# EAGLE board FR4 6.0 (EAGLE 7.2.0), part 1 of 2
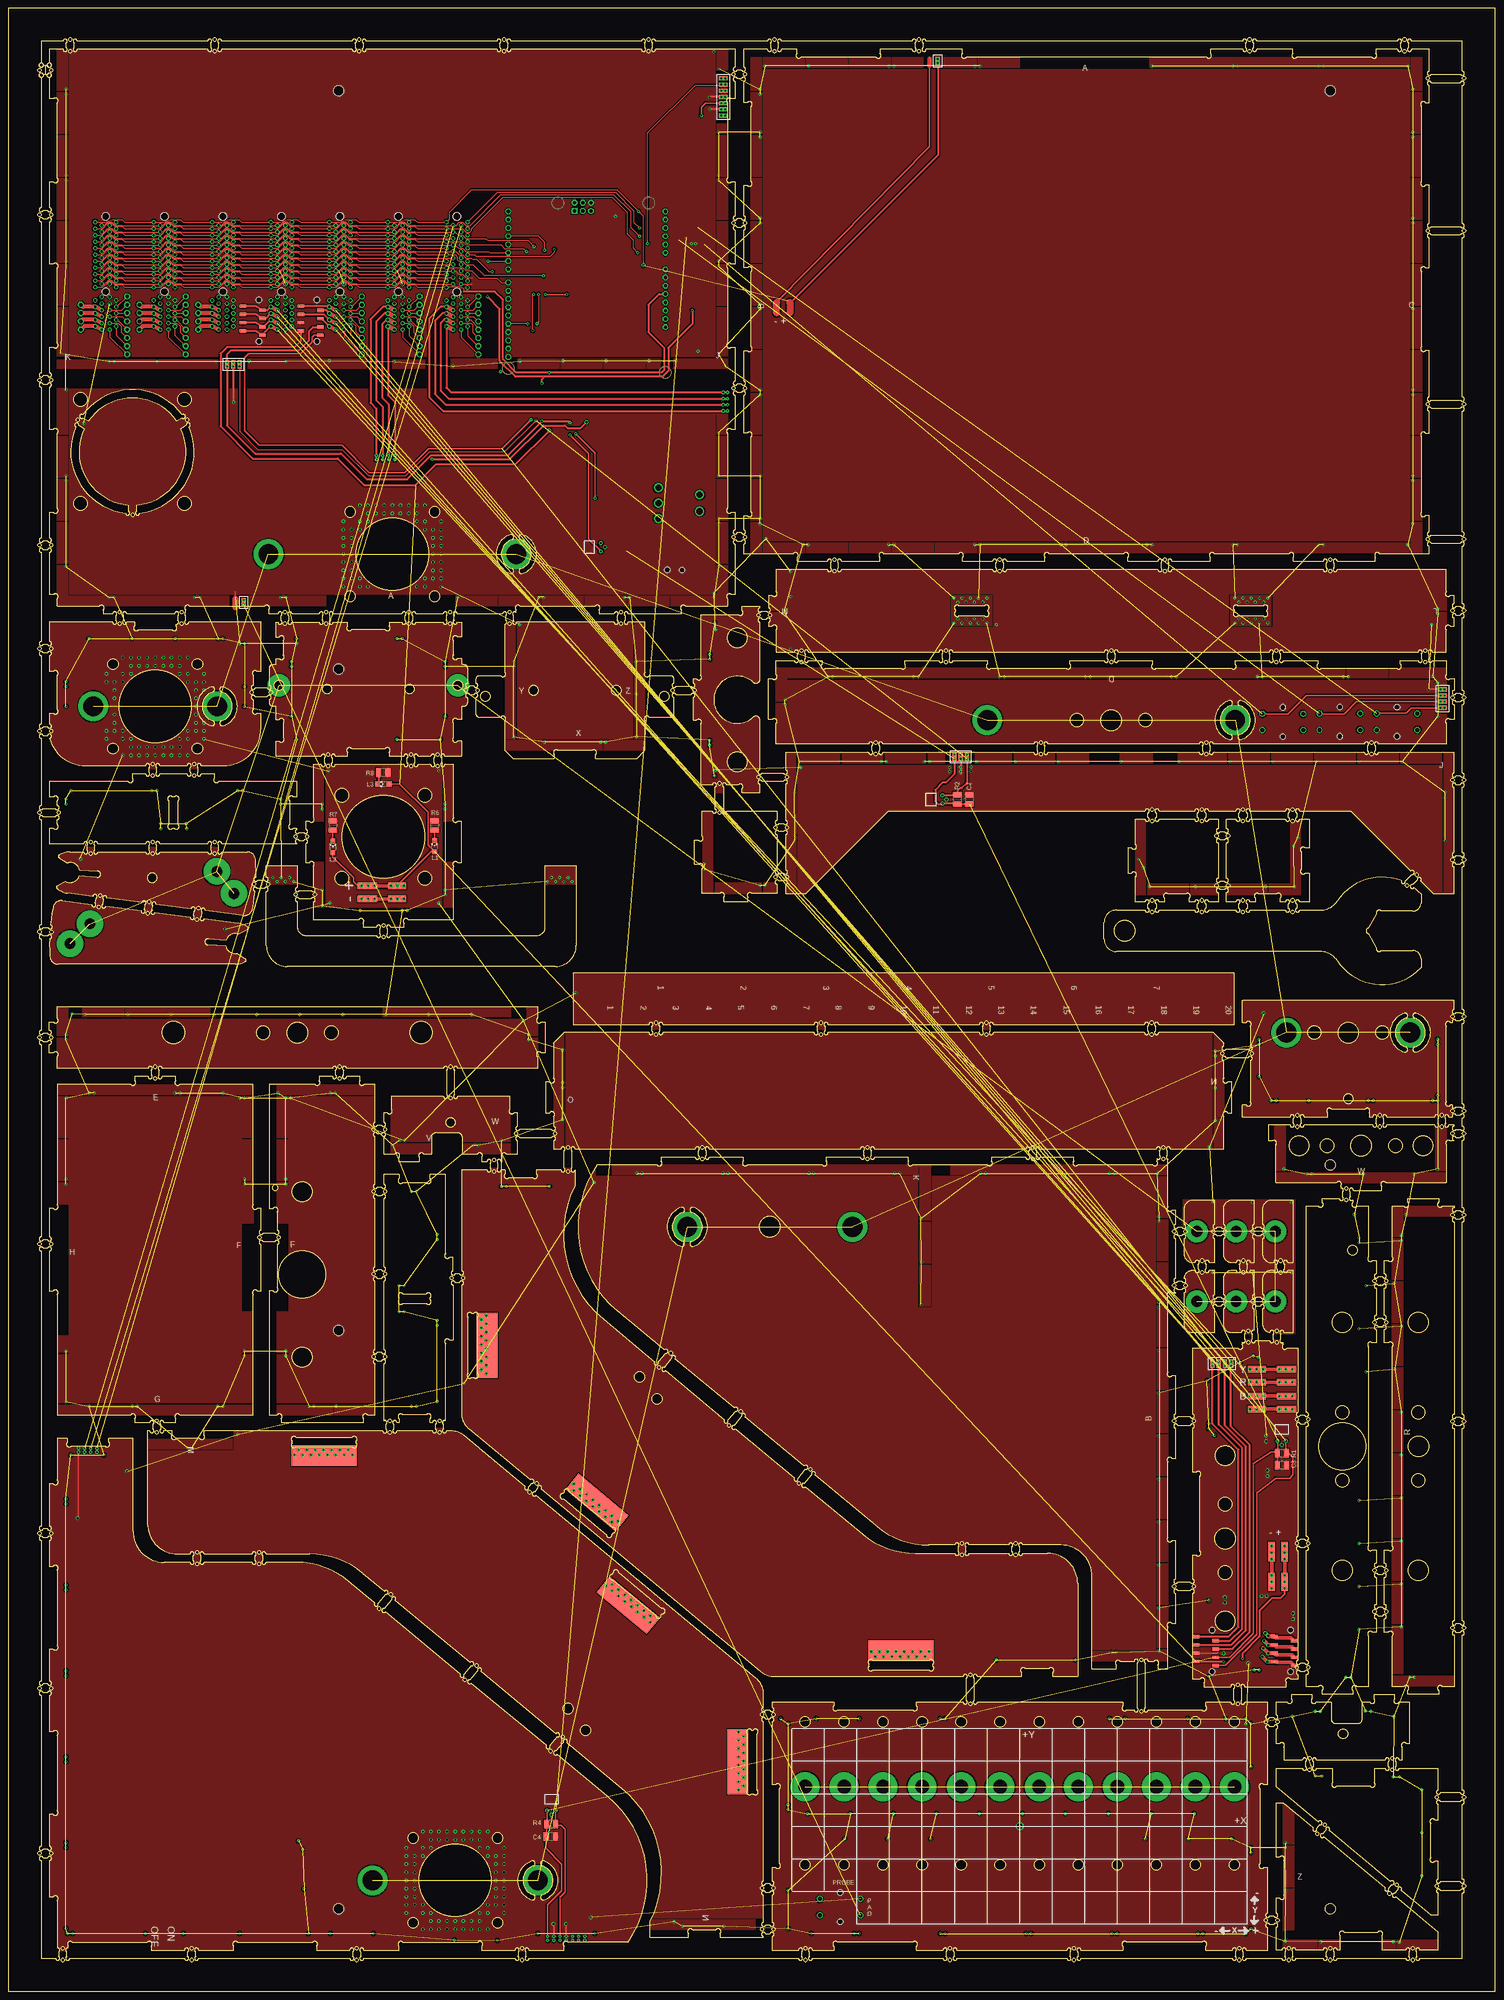
[diagram p0: board, top side]
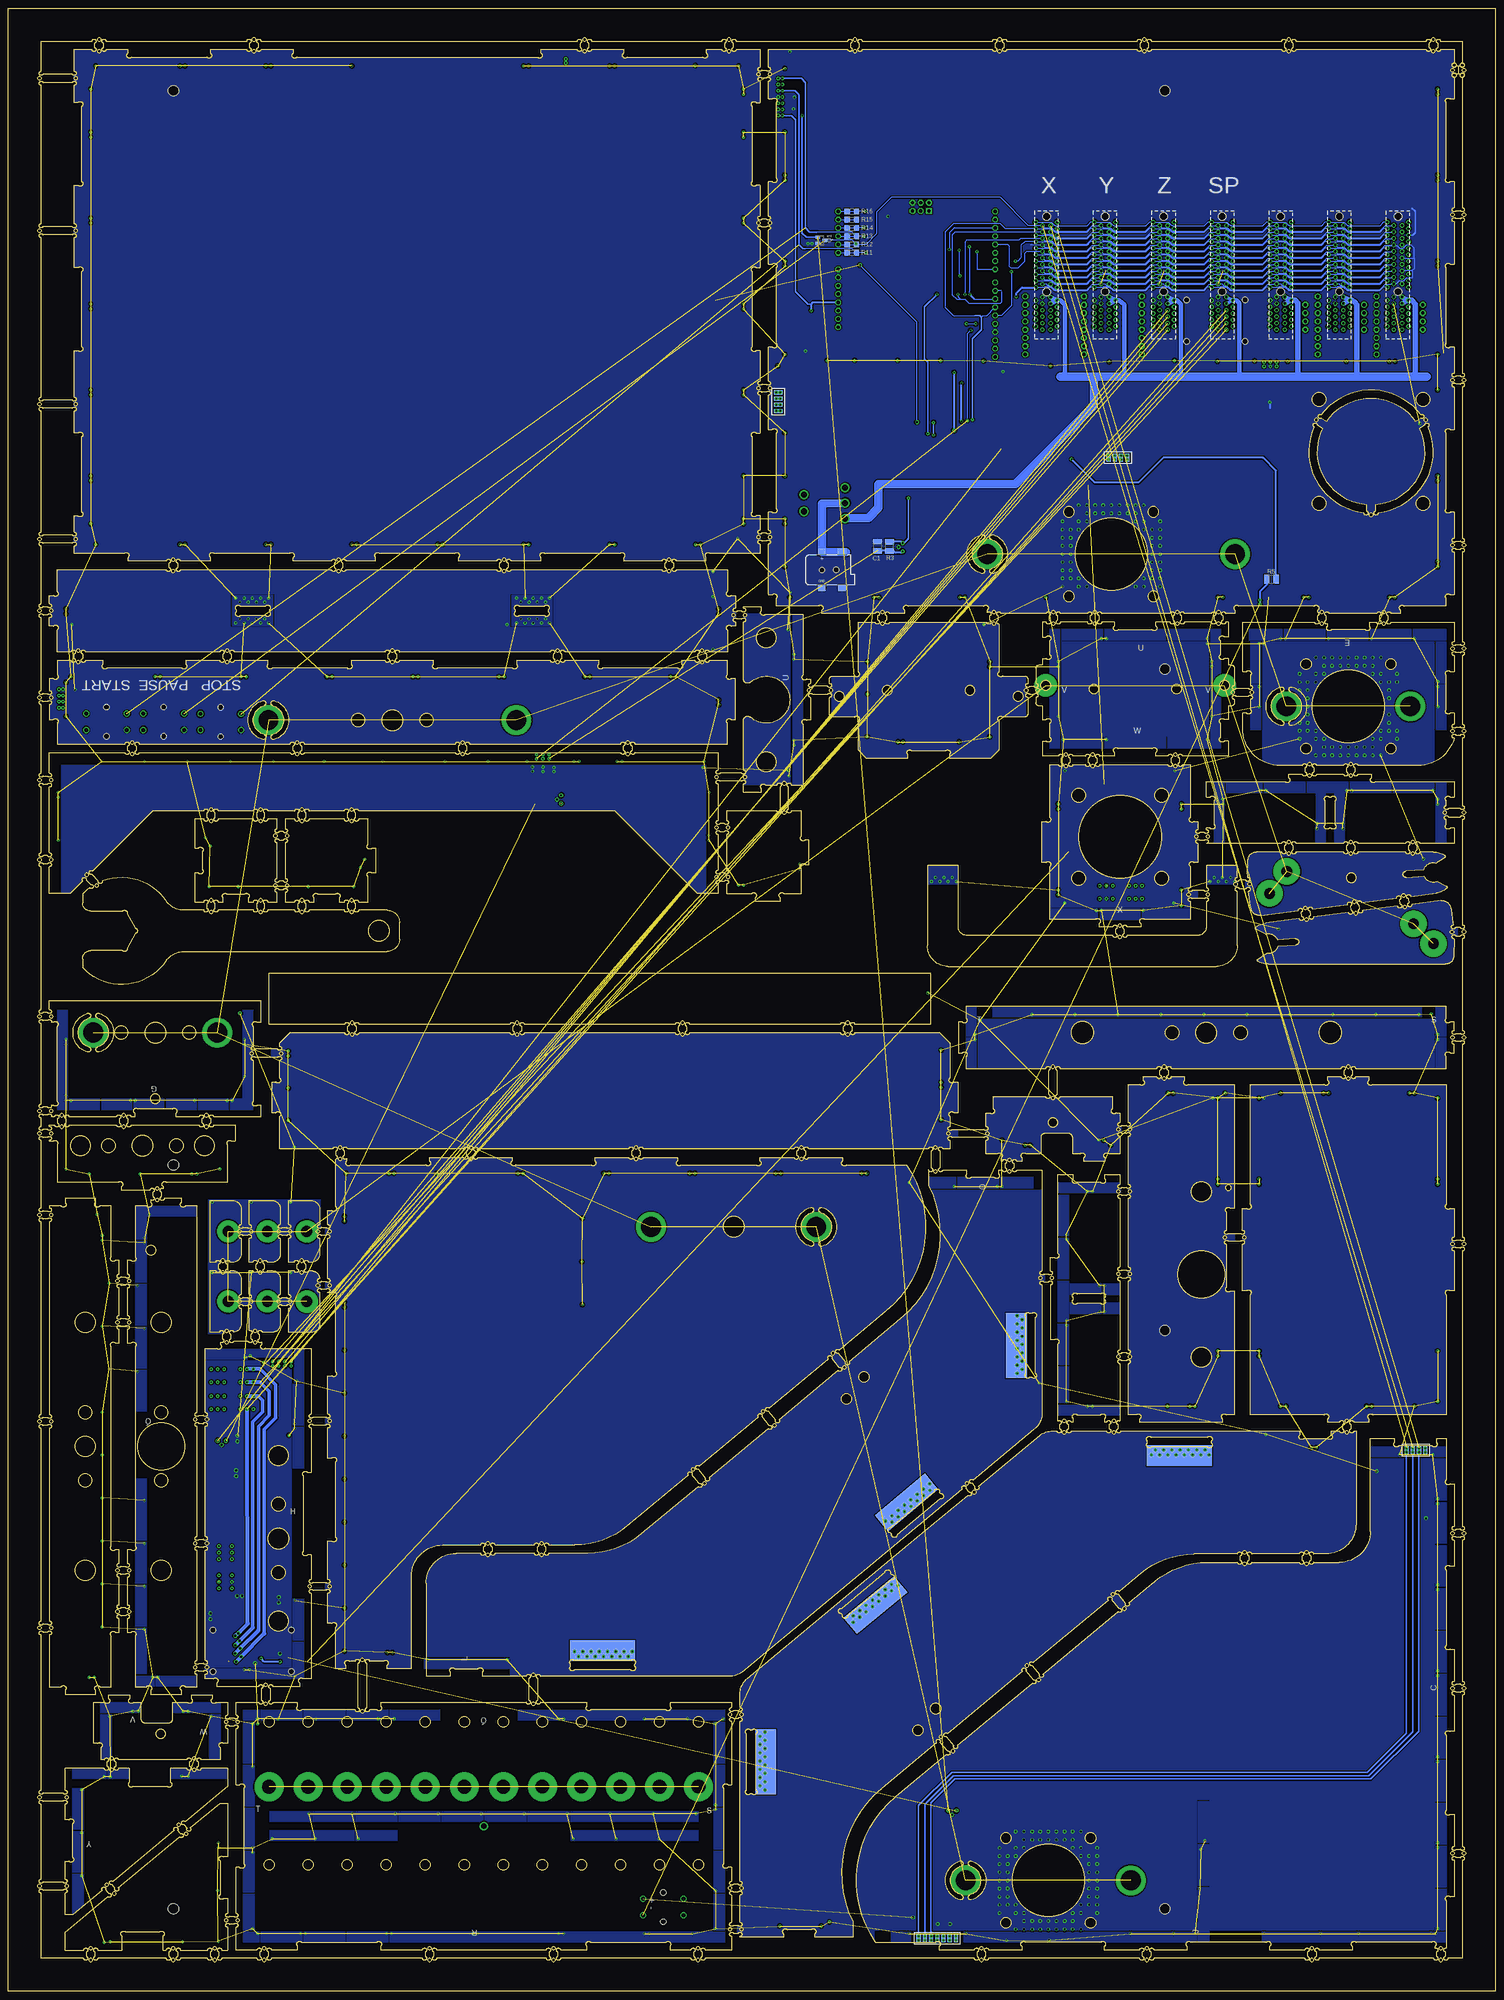
[diagram p1: board, bottom side, seen from below]

Size 457.2 x 609.6 mm. Coordinates in mm from the lower left corner, seen from the top.
Outline: 2926 segments
Outline: circle at 9.65,590.55 radius 0.51
Outline: circle at 10.16,592.07 radius 0.64
Outline: circle at 10.16,589.03 radius 0.64
Outline: circle at 12.7,589.03 radius 0.64
Outline: circle at 12.7,592.07 radius 0.64
Outline: circle at 13.21,590.55 radius 0.51
Outline: circle at 374.1,139.22 radius 3.17
Outline: circle at 234.17,234.98 radius 3.17
Outline: circle at 411.98,294.7 radius 3.17
Outline: circle at 415.93,259.92 radius 3.17
Outline: circle at 433.5,157.02 radius 2.03
Outline: circle at 433.5,178.02 radius 2.03
Outline: circle at 433.5,167.52 radius 3.17
Outline: circle at 127,294.69 radius 3.43
Outline: circle at 99.4,294.69 radius 2.1
Outline: circle at 88.9,294.69 radius 3.17
Outline: circle at 78.4,294.69 radius 2.1
Outline: circle at 50.8,294.69 radius 3.43
Outline: circle at 144.27,399.9 radius 0.51
Outline: circle at 140.72,399.9 radius 0.51
Copper layers (1*16): Top 0.035mm / dielectric 1.5mm / Bottom 0.035mm
Design rules "SparkFun *": minimum track width 8mil, minimum drill 20mil, track to track 15mil, track to pad 0.38mm, pad to pad 8mil, via to via 8mil, smd to smd 8mil, copper to edge 5mil, drill to drill 8mil, minimum pad ring 12mil, minimum via ring 10mil, stop-mask expansion 4mil, vias tented up to drill 400mil, thermal gap 10mil
Holes 3.17 mm at 101.6,25.4 406.4,25.4 406.4,254 101.6,584.2 101.6,406.4 101.6,203.2 406.4,584.2

## Footprints (pad centres in the part's own frame; a part is rotated, then mirrored left to right if it is on the bottom)
C1210 = smd 1.6 x 2.7: 1 -1.4,0; 2 1.4,0
DCJACK_2MM_SMT = smd 2.4 x 2: GND 0,-5.5; GNDBREAK 6.2,-5.5; PWR1 0,5.5; PWR2 6.2,5.5 | hole 1.6: 0,0 | hole 1.8: 4.5,0
1X04-CLEANBIG = drill 1.016 pad 1.778: 1 -3.81,0; 2 -1.27,0; 3 1.27,0; 4 3.81,0
1X08-CLEANBIG = drill 1.016 pad 1.778 octagon: 1 -8.89,0; 2 -6.35,0; 3 -3.81,0; 4 -1.27,0; 5 1.27,0; 6 3.81,0; 7 6.35,0; 8 8.89,0
CHIPLED_1206 = smd 1.5 x 1.5: A 0,-1.75; C 0,1.75
ARDUINOR3_ICSP = drill 1 pad 1.676 octagon: 3V 35.56,2.54; 5V 38.1,2.54; A0 50.8,2.54; A1 53.34,2.54; A2 55.88,2.54; A3 58.42,2.54; A4 60.96,2.54; A5 63.5,2.54; AREF 23.876,50.8; D0 63.5,50.8; D1 60.96,50.8; D2 58.42,50.8; D3 55.88,50.8; D4 53.34,50.8; D5 50.8,50.8; D6 48.26,50.8; D7 45.72,50.8; D8 41.656,50.8; D9 39.116,50.8; D10 36.576,50.8; D11 34.036,50.8; D12 31.496,50.8; D13 28.956,50.8; GND 26.416,50.8; GND@1 43.18,2.54; GND@2 40.64,2.54; IOREF 30.48,2.54; RESERVED 27.94,2.54; RESET 33.02,2.54; SCL 18.796,50.8; SDA 21.336,50.8; VIN 45.72,2.54 | drill 1 pad 1.778 octagon: 5V_ICSP 66.167,30.48; GND@3 66.167,25.4; MOSI 66.167,27.94; RESET_ICSP 63.627,25.4; SCK 63.627,27.94 | drill 1 pad 1.778 square: MISO 63.627,30.48
SOT23 = smd 1 x 1.4: 1 -0.95,-1.1; 2 0.95,-1.1; 3 0,1.1
R1210 = smd 1.6 x 2.7: 1 -1.4,0; 2 1.4,0
R1206 = smd 1.6 x 1.803: 1 -1.422,0; 2 1.422,0
STEPPER_PAD = smd 1.27 x 2.54: P$1 0,0; P$2 1.905,0; P$3 3.81,0; P$4 5.715,0 | drill 0.381: P$1@1 0,0.635; P$1@2 0,-0.635; P$2@1 1.905,0.635; P$2@2 1.905,-0.635; P$3@1 3.81,0.635; P$3@2 3.81,-0.635; P$4@1 5.715,0.635; P$4@2 5.715,-0.635
10018784-10211TLF-TRACE = drill 0.7 pad 1.016: P$1 1.25,-1; P$2 3.25,-2; P$3 1.25,-3; P$4 3.25,-4; P$5 1.25,-5; P$6 3.25,-6; P$7 1.25,-7; P$8 3.25,-8; P$9 1.25,-9; P$10 3.25,-10; P$11 1.25,-11; P$12 3.25,-14; P$13 1.25,-15; P$14 3.25,-16; P$15 1.25,-17; P$16 3.25,-18; P$17 1.25,-19; P$18 3.25,-20; P$19 1.25,-21; P$20 3.25,-22; P$21 1.25,-23; P$22 3.25,-24; P$23 1.25,-25; P$24 3.25,-26; P$25 1.25,-27; P$26 3.25,-28; P$27 1.25,-29; P$28 3.25,-30; P$29 1.25,-31; P$30 3.25,-32; P$31 1.25,-33; P$32 3.25,-34; P$33 -1.25,-1; P$34 -3.25,-2; P$35 -1.25,-3; P$36 -3.25,-4; P$37 -1.25,-5; P$38 -3.25,-6; P$39 -1.25,-7; P$40 -3.25,-8; P$41 -1.25,-9; P$42 -3.25,-10; P$43 -1.25,-11; P$44 -3.25,-14; P$45 -1.25,-15; P$46 -3.25,-16; P$47 -1.25,-17; P$48 -3.25,-18; P$49 -1.25,-19; P$50 -3.25,-20; P$51 -1.25,-21; P$52 -3.25,-22; P$53 -1.25,-23; P$54 -3.25,-24; P$55 -1.25,-25; P$56 -3.25,-26; P$57 -1.25,-27; P$58 -3.25,-28; P$59 -1.25,-29; P$60 -3.25,-30; P$61 -1.25,-31; P$62 -3.25,-32; P$63 -1.25,-33; P$64 -3.25,-34 | hole 2.35: 0,-12.65; 0,-35.8
1001874-10211TLF- = drill 0.7 pad 1.016: P$1 1.25,-0.99; P$2 3.25,-1.99; P$3 1.25,-2.99; P$4 3.25,-3.99; P$5 1.25,-4.99; P$6 3.25,-5.99; P$7 1.25,-6.99; P$8 3.25,-7.99; P$9 1.25,-8.99; P$10 3.25,-9.99; P$11 1.25,-10.99; P$12 3.25,-13.99; P$13 1.25,-14.99; P$14 3.25,-15.99; P$15 1.25,-16.99; P$16 3.25,-17.99; P$17 1.25,-18.99; P$18 3.25,-19.99; P$19 1.25,-20.99; P$20 3.25,-21.99; P$21 1.25,-22.99; P$22 3.25,-23.99; P$23 1.25,-24.99; P$24 3.25,-25.99; P$25 1.25,-26.99; P$26 3.25,-27.99; P$27 1.25,-28.99; P$28 3.25,-29.99; P$29 1.25,-30.99; P$30 3.25,-31.99; P$31 1.25,-32.99; P$32 3.25,-33.99; P$33 -1.25,-0.99; P$34 -3.25,-1.99; P$35 -1.25,-2.99; P$36 -3.25,-3.99; P$37 -1.25,-4.99; P$38 -3.25,-5.99; P$39 -1.25,-6.99; P$40 -3.25,-7.99; P$41 -1.25,-8.99; P$42 -3.25,-9.99; P$43 -1.25,-10.99; P$44 -3.25,-13.99; P$45 -1.25,-14.99; P$46 -3.25,-15.99; P$47 -1.25,-16.99; P$48 -3.25,-17.99; P$49 -1.25,-18.99; P$50 -3.25,-19.99; P$51 -1.25,-20.99; P$52 -3.25,-21.99; P$53 -1.25,-22.99; P$54 -3.25,-23.99; P$55 -1.25,-24.99; P$56 -3.25,-25.99; P$57 -1.25,-26.99; P$58 -3.25,-27.99; P$59 -1.25,-28.99; P$60 -3.25,-29.99; P$61 -1.25,-30.99; P$62 -3.25,-31.99; P$63 -1.25,-32.99; P$64 -3.25,-33.99 | hole 2.35: 0,-12.64; 0,-35.79
90814-0808 = smd 1 x 2: P$1 0,0; P$2 1.27,5.999; P$3 2.54,0; P$4 3.81,5.999; P$5 5.08,0; P$6 6.35,5.999; P$7 7.62,0; P$8 8.89,5.999 | hole 1.75: -1.93,1.1; 10.81,1.1
104188-0210 = drill 0.381: P$1 -2,2; P$2 0,2; P$3 2,2; P$4 7,2; P$5 9,2; P$6 11,2; P$7 11,-2; P$8 9,-2; P$9 7,-2; P$10 2,-2; P$11 0,-2; P$12 -2,-2 | smd 5.5 x 2: PIN_1@1 0,2; PIN_2@1 0,-2 | smd 6 x 2: PIN_1@2 9.25,2; PIN_2@2 9.25,-2
3_WIRE_PAD = smd 1.27 x 2.54: P$1 0,0; P$2 1.905,0; P$3 3.81,0 | drill 0.381: P$1@1 0,0.635; P$1@2 0,-0.635; P$2@1 1.905,0.635; P$2@2 1.905,-0.635; P$3@1 3.81,0.635; P$3@2 3.81,-0.635
DRV5033_TO_92 = drill 0.559: P$1 -1.27,-3.5; P$2 0,-4.77; P$3 1.27,-3.5
WELDPAD_.79X.353 = smd 20.066 x 6.35: P$1 0,-4.064 | drill 0.381: P$2 -9.144,-3.81; P$4 -6.604,-3.81; P$6 -4.064,-3.81; P$8 -1.524,-3.81; P$10 1.016,-3.81; P$12 3.556,-3.81; P$14 6.096,-3.81; P$16 8.636,-3.81; P$18 -7.874,-2.286; P$20 -5.334,-2.286; P$22 -2.794,-2.286; P$24 -0.254,-2.286; P$26 2.286,-2.286; P$28 4.826,-2.286; P$30 7.366,-2.286 | smd 20.066 x 6.35 bottom: P$34 0,-4.064
STEPPER_PAD-7 = smd 1.27 x 2.54: P$1 0,0; P$2 1.905,0; P$3 3.81,0; P$4 5.715,0; P$5 7.62,0; P$6 9.525,0; P$7 11.43,0 | drill 0.381: P$1@1 0,0.635; P$1@2 0,-0.635; P$2@1 1.905,0.635; P$2@2 1.905,-0.635; P$3@1 3.81,0.635; P$3@2 3.81,-0.635; P$4@1 5.715,0.635; P$4@2 5.715,-0.635; P$5@1 7.62,0.635; P$5@2 7.62,-0.635; P$6@1 9.525,0.635; P$6@2 9.525,-0.635; P$7@1 11.43,0.635; P$7@2 11.43,-0.635
12MM_BUTTON = drill 1.2: P$1 -6.25,2.5; P$2 6.25,2.5; P$3 -6.25,-2.5; P$4 6.25,-2.5 | hole 1.7: 0,4.5; 0,-4.5
1PIN_PAD = smd 1.27 x 2.54: P$1 0,0 | drill 0.381: P$1@1 0,0.635; P$1@2 0,-0.635
100SP1T2B4M6QE = drill 1.85: P$1 0,0; P$2 0,-5.08; P$3 12.7,-2.54; P$4 12.7,2.16; P$5 12.7,-7.24

## Placement (x,y rotation side)
C1  [C1210]  189.99,444.2 270 bottom
C2  [C1210]  295.43,366.42 270 top
C3  [C1210]  391.54,161.72 180 top
C4  [C1210]  166.85,47.57 180 top
CN1  [DCJACK_2MM_SMT]  207.09,436.91 0 bottom
CN2  1X4-CLEANBIG  [1X04-CLEANBIG]  40.39,514.6 90 top
CN3  1X4-CLEANBIG  [1X04-CLEANBIG]  22.35,514.6 90 top
CN4  1X4-CLEANBIG  [1X04-CLEANBIG]  58.42,514.6 90 top
JP1  [1X08-CLEANBIG]  54.61,512.06 90 top
JP2  [1X08-CLEANBIG]  36.58,512.06 90 top
JP3  [1X08-CLEANBIG]  144.53,512.06 90 top
JP4  [1X08-CLEANBIG]  126.49,512.06 90 top
JP5  [1X08-CLEANBIG]  108.71,512.06 90 top
L1  [CHIPLED_1206]  131.06,352.04 0 top
L2  [CHIPLED_1206]  99.82,351.79 0 top
L3  [CHIPLED_1206]  115.32,371.09 90 top
M1  ARDUINO_R3_ICSP  [ARDUINOR3_ICSP]  204.59,483.62 90 top
Q1  [SOT23]  207.26,538.23 270 bottom
R1  1k  [R1210]  391.54,165.43 0 top
R2  1k  [R1210]  291.82,366.37 90 top
R3  1k  [R1210]  186.31,444.17 90 bottom
R4  1k  [R1210]  166.9,51.46 0 top
R5  1k  [R1210]  68.83,434.09 0 bottom
R6  1k  [R1210]  131.06,358.39 270 top
R7  1k  [R1210]  99.82,358.39 270 top
R8  1k  [R1210]  115.32,374.65 180 top
R11  [R1206]  197.87,534.42 180 bottom
R12  [R1206]  197.87,536.96 180 bottom
R13  [R1206]  197.87,539.5 180 bottom
R14  [R1206]  197.87,542.04 180 bottom
R15  [R1206]  197.87,544.58 180 bottom
R16  [R1206]  197.87,547.12 180 bottom
U$1  STEPPER_PAD  [STEPPER_PAD]  220.47,491.49 270 bottom
U$2  10018784-10211TLF-TRACE  [10018784-10211TLF-TRACE]  30,509.79 180 bottom
U$3  10018784-10211TLF-TRACE  [10018784-10211TLF-TRACE]  48,509.79 180 bottom
U$4  10018784-10211TLF-TRACE  [10018784-10211TLF-TRACE]  66,509.79 180 bottom
U$5  10018784-10211TLF-TRACE  [10018784-10211TLF-TRACE]  84,509.79 180 bottom
U$6  10018784-10211TLF-TRACE  [10018784-10211TLF-TRACE]  102,509.79 180 bottom
U$7  10018784-10211TLF-TRACE  [10018784-10211TLF-TRACE]  120,509.79 180 bottom
U$8  10018784-10211TLF-  [1001874-10211TLF-]  138,509.79 180 bottom
U$9  STEPPER_PAD  [STEPPER_PAD]  118.9,471.42 0 bottom
U$10  90814-0808  [90814-0808]  95.98,509.08 90 top
U$11  90814-0808  [90814-0808]  78.13,509.11 90 top
U$12  104188-0210  [104188-0210]  383.79,189.23 0 top
U$13  3_PIN_PAD  [3_WIRE_PAD]  290.92,379.53 0 top
U$14  90814-0808  [90814-0808]  371.17,100.16 90 top
U$15  90814-0808  [90814-0808]  395.36,100.16 90 top
U$16  3_PIN_PAD  [3_WIRE_PAD]  67.31,500.13 0 top
U$17  104188-0210  [104188-0210]  383.79,180.97 0 top
U$18  DRV5033_TO_92  [DRV5033_TO_92]  178.69,443.92 90 top
U$19  DRV5033_TO_92  [DRV5033_TO_92]  283.69,366.37 90 top
U$20  DRV5033_TO_92  [DRV5033_TO_92]  391.52,172.75 0 top
U$21  DRV5033_TO_92  [DRV5033_TO_92]  166.98,59.05 0 top
U$22  WELDPAD_.79X.353  [WELDPAD_.79X.353]  193.17,121.86 320.5 top
U$23  WELDPAD_.79X.353  [WELDPAD_.79X.353]  178.44,147.19 220 bottom
U$24  WELDPAD_.79X.353  [WELDPAD_.79X.353]  274.45,100.65 180 bottom
U$25  WELDPAD_.79X.353  [WELDPAD_.79X.353]  228.35,70.55 270 top
U$26  WELDPAD_.79X.353  [WELDPAD_.79X.353]  143.19,198.56 270 bottom
U$27  WELDPAD_.79X.353  [WELDPAD_.79X.353]  97.16,168.72 0 top
U$28  104188-0210  [104188-0210]  390.4,125.86 90 top
U$29  104188-0210  [104188-0210]  119.63,337.82 180 top
U$30  STEPPER_PAD-7  [STEPPER_PAD-7]  165.86,16.33 180 bottom
U$31  STEPPER_PAD  [STEPPER_PAD]  21.59,166.37 180 bottom
U$32  STEPPER_PAD-7  [STEPPER_PAD-7]  219.84,576.58 90 top
U$33  STEPPER_PAD  [STEPPER_PAD]  440.94,400.23 270 top
U$34  STEPPER_PAD  [STEPPER_PAD]  375.92,192.91 180 top
U$35  SKHCBFA010_12MM_BUTTON  [12MM_BUTTON]  426.95,390.25 0 bottom
U$36  SKHCBFA010_12MM_BUTTON  [12MM_BUTTON]  409.37,390.25 0 bottom
U$37  SKHCBFA010_12MM_BUTTON  [12MM_BUTTON]  391.85,390.19 0 bottom
U$39  1PIN_PAD  [1PIN_PAD]  72.39,426.97 0 top
U$40  1PIN_PAD  [1PIN_PAD]  285.75,593.34 0 top
U$41  100SP1T2B4M6QE  [100SP1T2B4M6QE]  212.6,454.91 180 top
U$42  SKHCBFA010_12MM_BUTTON  [12MM_BUTTON]  255.78,25.91 0 top

## Library data of the parts
C1-C4 CN1-CN4 JP1-JP5 L1-L3 M1 Q1 R1-R8 R11-R16 = adafruit
U$1-U$37 U$39-U$42 = PocketNC

## Nets
3V: C1.2 C2.2 C3.2 C4.2 M1.3V R1.1 R2.1 R3.1 R4.1 U$8.P$12 U$10.P$3 U$13.P$1@2 U$14.P$3 U$16.P$1@2 U$18.P$1 U$19.P$1 U$20.P$1 U$21.P$1 U$30.P$1@2 U$32.P$1@2
5V: L1.A L2.A L3.A M1.5V U$8.P$44 U$10.P$2 U$14.P$2 U$28.P$11 U$29.P$11
AUX1_A1: CN4.1 U$4.P$33 U$4.P$34
AUX1_A2: CN4.2 U$4.P$35 U$4.P$36
AUX1_A3: CN4.3 U$4.P$37 U$4.P$38
AUX1_A4: CN4.4 U$4.P$39 U$4.P$40
AUX1_B1: U$4.P$1
AUX1_B2: U$4.P$2
AUX1_B3: U$4.P$3
AUX1_B4: U$4.P$4
AUX1_B5: U$4.P$5
AUX1_B6: U$4.P$6
AUX1_B7: U$4.P$7
AUX1_B8: U$4.P$8
AUX2_A1: CN2.1 U$3.P$33 U$3.P$34
AUX2_A2: CN2.2 U$3.P$35 U$3.P$36
AUX2_A3: CN2.3 U$3.P$37 U$3.P$38
AUX2_A4: CN2.4 U$3.P$39 U$3.P$40
AUX2_B1: JP1.1 U$3.P$1
AUX2_B2: JP1.2 U$3.P$2
AUX2_B3: JP1.3 U$3.P$3
AUX2_B4: JP1.4 U$3.P$4
AUX2_B5: JP1.5 U$3.P$5
AUX2_B6: JP1.6 U$3.P$6
AUX2_B7: JP1.7 U$3.P$7
AUX2_B8: JP1.8 U$3.P$8
AUX3_A1: CN3.1 U$2.P$33 U$2.P$34
AUX3_A2: CN3.2 U$2.P$35 U$2.P$36
AUX3_A3: CN3.3 U$2.P$37 U$2.P$38
AUX3_A4: CN3.4 U$2.P$39 U$2.P$40
AUX3_B1: JP2.1 U$2.P$1
AUX3_B2: JP2.2 U$2.P$2
AUX3_B3: JP2.3 U$2.P$3
AUX3_B4: JP2.4 U$2.P$4
AUX3_B5: JP2.5 U$2.P$5
AUX3_B6: JP2.6 U$2.P$6
AUX3_B7: JP2.7 U$2.P$7
AUX3_B8: JP2.8 U$2.P$8
DIR_5: U$8.P$59
DIR_X: M1.D5 U$8.P$57
DIR_Y: M1.D6 U$8.P$26
DIR_Z: M1.D7 U$8.P$58
ENBL: M1.D8 U$8.P$50
ENBL_2: U$8.P$19
ENBL_3: U$8.P$51
ENBL_4: U$8.P$20
ENBL_5: U$8.P$52
ENBL_6: U$8.P$21
GND: C1.1 C2.1 C3.1 C4.1 CN1.GND CN1.GNDBREAK M1.GND M1.GND@1 M1.GND@3 Q1.2 R6.1 R7.1 R8.1 U$2.P$9 U$2.P$10 U$2.P$11 U$2.P$13 U$2.P$25 U$2.P$49 U$2.P$53 U$2.P$60 U$3.P$9 U$3.P$10 U$3.P$11 U$3.P$13 U$3.P$25 U$3.P$49 U$3.P$53 U$3.P$60 U$4.P$9 U$4.P$10 U$4.P$11 U$4.P$13 U$4.P$25 U$4.P$49 U$4.P$53 U$4.P$60 U$5.P$9 U$5.P$10 U$5.P$11 U$5.P$13 U$5.P$25 U$5.P$49 U$5.P$53 U$5.P$60 U$6.P$9 U$6.P$10 U$6.P$11 U$6.P$13 U$6.P$25 U$6.P$49 U$6.P$53 U$6.P$60 U$7.P$9 U$7.P$10 U$7.P$11 U$7.P$13 U$7.P$25 U$7.P$49 U$7.P$53 U$7.P$60 U$8.P$9 U$8.P$10 U$8.P$11 U$8.P$13 U$8.P$25 U$8.P$49 U$8.P$53 U$8.P$60 U$10.P$4 U$13.P$2@2 U$14.P$4 U$16.P$2@2 U$18.P$2 U$19.P$2 U$20.P$2 U$21.P$2 U$28.P$2 U$29.P$2 U$30.P$2@2 U$30.P$4@2 U$31.P$1@2 U$32.P$2@2 U$32.P$4@2 U$33.P$1@2 U$35.P$4 U$36.P$4 U$37.P$4 U$42.P$2
LATCH_1: U$8.P$46
LATCH_2: U$8.P$15
LATCH_3: U$8.P$47
LATCH_4: U$8.P$16
LATCH_5: U$8.P$48
LATCH_6: U$8.P$17
LIM_X: M1.D9 R3.2 U$8.P$29 U$18.P$3
LIM_Y: M1.D10 R2.2 U$8.P$61 U$13.P$3@2 U$16.P$3@2 U$19.P$3
LIM_Z: M1.D11 R1.2 U$8.P$30 U$10.P$1 U$14.P$1 U$20.P$3
M8: R14.1 U$8.P$32
N$8: L1.C R6.2
N$9: R15.1
N$10: L2.C R7.2
N$11: L3.C R8.2
N$12: M1.A0 R11.2
N$13: M1.A1 R12.2
N$17: M1.A2 R13.2
N$18: M1.A3 R14.2
N$19: M1.A4 R15.2
N$20: M1.A5 R16.2
N$30: U$8.P$28
PAUSE: Q1.3 R12.1 U$8.P$31 U$30.P$6@2 U$31.P$3@2 U$32.P$6@2 U$33.P$3@2 U$36.P$2
PAUSE_INVERT: Q1.1 R4.2 U$21.P$3 U$30.P$3@2 U$32.P$3@2
POWER: CN1.PWR1 U$41.P$3
PROBE: R5.2 R16.1 U$8.P$64 U$40.P$1@2
PROBE_OUT: R5.1 U$39.P$1@2 U$42.P$4
RESET: U$8.P$18
SP_A1: U$5.P$33 U$5.P$34 U$11.P$1 U$11.P$2 U$12.P$2 U$15.P$1 U$15.P$2
SP_A2: U$5.P$35 U$5.P$36 U$11.P$3 U$11.P$4 U$12.P$11 U$15.P$3 U$15.P$4
SP_A3: U$5.P$37 U$5.P$38 U$11.P$5 U$11.P$6 U$15.P$5 U$15.P$6 U$17.P$2
SP_A4: U$5.P$39 U$5.P$40 U$11.P$7 U$11.P$8 U$15.P$7 U$15.P$8 U$17.P$11
SP_B1: U$5.P$1
SP_B2: U$5.P$2
SP_B3: U$5.P$3
SP_B4: U$5.P$4
SP_B5: U$5.P$5
SP_B6: U$5.P$6
SP_B7: U$5.P$7
SP_B8: U$5.P$8
SP_DIR: M1.D13 U$8.P$27
SP_PWM: M1.D12 U$8.P$55
START: R13.1 U$8.P$63 U$30.P$7@2 U$31.P$4@2 U$32.P$7@2 U$33.P$4@2 U$35.P$2
STEP_5: U$8.P$24
STEP_6: U$8.P$56
STEP_X: M1.D2 U$8.P$22
STEP_Y: M1.D3 U$8.P$54
STEP_Z: M1.D4 U$8.P$23
STOP: R11.1 U$8.P$62 U$30.P$5@2 U$31.P$2@2 U$32.P$5@2 U$33.P$2@2 U$37.P$2
SYS_CLK: U$8.P$45
SYS_DAT: U$8.P$14
VCC: U$2.P$41 U$2.P$42 U$2.P$43 U$3.P$41 U$3.P$42 U$3.P$43 U$4.P$41 U$4.P$42 U$4.P$43 U$5.P$41 U$5.P$42 U$5.P$43 U$6.P$41 U$6.P$42 U$6.P$43 U$7.P$41 U$7.P$42 U$7.P$43 U$8.P$41 U$8.P$42 U$8.P$43 U$41.P$4
VIN: M1.VIN
X_A1: U$1.P$1@2 U$8.P$33 U$8.P$34
X_A2: U$1.P$2@2 U$8.P$35 U$8.P$36
X_A3: U$1.P$3@2 U$8.P$37 U$8.P$38
X_A4: U$1.P$4@2 U$8.P$39 U$8.P$40
X_B1: JP3.1 U$8.P$1
X_B2: JP3.2 U$8.P$2
X_B3: JP3.3 U$8.P$3
X_B4: JP3.4 U$8.P$4
X_B5: JP3.5 U$8.P$5
X_B6: JP3.6 U$8.P$6
X_B7: JP3.7 U$8.P$7
X_B8: JP3.8 U$8.P$8
Y_A1: U$7.P$33 U$7.P$34 U$9.P$1@2
Y_A2: U$7.P$35 U$7.P$36 U$9.P$2@2
Y_A3: U$7.P$37 U$7.P$38 U$9.P$3@2
Y_A4: U$7.P$39 U$7.P$40 U$9.P$4@2
Y_B1: JP4.1 U$7.P$1
Y_B2: JP4.2 U$7.P$2
Y_B3: JP4.3 U$7.P$3
Y_B4: JP4.4 U$7.P$4
Y_B5: JP4.5 U$7.P$5
Y_B6: JP4.6 U$7.P$6
Y_B7: JP4.7 U$7.P$7
Y_B8: JP4.8 U$7.P$8
Z_A1: U$6.P$33 U$6.P$34 U$10.P$5 U$14.P$5 U$34.P$1@2
Z_A2: U$6.P$35 U$6.P$36 U$10.P$6 U$14.P$6 U$34.P$2@2
Z_A3: U$6.P$37 U$6.P$38 U$10.P$7 U$14.P$7 U$34.P$3@2
Z_A4: U$6.P$39 U$6.P$40 U$10.P$8 U$14.P$8 U$34.P$4@2
Z_B1: JP5.1 U$6.P$1
Z_B2: JP5.2 U$6.P$2
Z_B3: JP5.3 U$6.P$3
Z_B4: JP5.4 U$6.P$4
Z_B5: JP5.5 U$6.P$5
Z_B6: JP5.6 U$6.P$6
Z_B7: JP5.7 U$6.P$7
Z_B8: JP5.8 U$6.P$8

## Tracks (layer width: path | path; a pad name or v marks a point on that pad's centre or on a via)
3V  (via drill 0.38)  (4 unrouted)
  Top 0.406: U$14.P$3 375.5,102.7 382.78,109.98 382.78,162.31 388.37,165.86 390.06,165.86 | v172.72,478.41 178.44,472.69 178.44,446.4 U$18.P$1 | R2.1 294.62,364.97 C2.2 | U$30.P$1@2 165.86,26.67 170.18,30.99 170.18,39.12 165.35,43.94 165.35,47.48 C4.2 165.5,47.62 R4.1 165.71,51.67 U$21.P$1 | 390.06,165.86 390.14,165.79 R1.1 C3.2 | 390.06,165.86 390.25,166.04 U$20.P$1
  Top 0.61: U$10.P$3 95.91,511.56 93.73,511.56 92.46,510.29 92.46,507.49 89.41,504.44 68.58,504.44 67.31,503.17 U$16.P$1@2 67.31,481.33 75.95,472.69 102.36,472.69 110.24,464.82 122.68,464.82 130.05,472.19 153.67,472.19 v164.08,482.6 172.34,482.6 v172.72,482.22 | U$13.P$1@2 290.92,374.23 288.29,371.6 287.27,371.6 284.99,369.32 284.99,365.76 285.75,365 287.09,365 | v210.31,516.64 210.31,512.57 202.95,505.21 202.95,498.09 201.17,496.32 164.85,496.32 | 164.85,496.32 155.96,496.32 151.13,501.14 151.13,517.14 v147.32,520.95 | v164.08,494.28 164.08,495.55 164.85,496.32 | R2.1 291.69,365.1 U$19.P$1
  Bottom 0.406: v172.72,478.41 v172.72,482.22 | U$32.P$1@2 216.41,576.58 215.14,575.31 215.14,522.48 211.33,518.67 210.31,518.67
  Bottom 0.61: v210.31,516.64 210.31,518.67 209.8,519.18 M1.3V | v147.32,520.95 147.32,521.97 145.54,523.75 141.29,523.75 U$8.P$12 | v164.08,482.6 v164.08,494.28 | R3.1 186.33,442.8 C1.2 | R3.1 186.19,442.65 | U$18.P$1 182.62,442.21 184.4,442.21 184.96,442.77 R3.1
5V  (via drill 0.38, 0.6)  (4 unrouted)
  Top 0.305: U$8.P$44 137.2,523.78 137.41,524 138.56,524 138.81,523.75 139.7,523.75 139.95,523.49 139.95,522.61 140.08,522.48
  Top 0.406: 373.55,101.43 v373.63,101.35 | 130.11,350.29 L1.A 129.03,352.33 129.03,362.46 120.4,371.09 L3.A | 119.6,339.85 107.44,339.85 106.17,341.12 106.17,342.39 99.82,348.74 L2.A
  Top 0.61: U$14.P$2 373.55,101.43 | v379.48,102.36 379.48,103.89 384.81,109.22 384.81,117.09 388.62,120.9 391.16,120.9 392.43,122.17 392.43,125.83 | U$10.P$2 89.98,507.3 88.14,505.46 67.31,505.46 65.28,503.43 65.28,481.08 75.18,471.17 101.35,471.17 109.47,463.04 125.22,463.04 131.57,469.39 155.96,469.39 v166.37,479.81 | 140.08,522.48 149.61,522.48 152.15,519.94 152.15,501.65 156.21,497.59 v166.37,497.59 200.91,497.59 201.68,498.35 201.68,505.21 196.85,510.03 196.85,518.41 200.16,521.72 M1.5V | L1.A 130.04,350.29 119.6,339.85
  Bottom 0.61: v373.63,101.35 378.46,101.35 v379.48,102.36 | v166.37,479.81 v166.37,497.59
AUX1_A1
  Top 1.27: CN4.1 59.42,511.79 U$4.P$34 U$4.P$33
AUX1_A2
  Top 1.27: CN4.2 58.88,513.79 U$4.P$36 U$4.P$35
AUX1_A3
  Top 1.27: CN4.3 58.5,515.79 U$4.P$38 U$4.P$37
AUX1_A4
  Top 1.27: CN4.4 59.04,517.79 U$4.P$40 U$4.P$39
AUX2_A1
  Top 1.27: U$3.P$33 U$3.P$34 41.39,511.79 CN2.1
AUX2_A2
  Top 1.27: U$3.P$35 U$3.P$36 40.85,513.79 CN2.2
AUX2_A3
  Top 1.27: U$3.P$37 U$3.P$38 40.47,515.79 CN2.3
AUX2_A4
  Top 1.27: U$3.P$39 U$3.P$40 41.01,517.79 CN2.4
AUX2_B1
  Top 0.305: U$3.P$1 49.25,508.53 JP1.1
AUX2_B2
  Top 0.305: U$3.P$2 51.25,509.07 JP1.2
AUX2_B3
  Top 0.305: U$3.P$3 51.85,512.79 52.83,511.81 52.83,510.03 JP1.3
AUX2_B4
  Top 0.305: 51.61,513.79 JP1.4
  Top 0.406: U$3.P$4 51.61,513.79
AUX2_B5
  Top 0.305: U$3.P$5 53.15,514.79 JP1.5
AUX2_B6
  Top 0.305: U$3.P$6 54.53,515.79
  Top 0.406: 54.53,515.79 JP1.6
AUX2_B7
  Top 0.305: U$3.P$7 52.99,516.79 JP1.7
AUX2_B8
  Top 0.305: 51.45,517.79 JP1.8
  Top 0.406: U$3.P$8 51.45,517.79
AUX3_A1
  Top 1.27: CN3.1 23.35,511.79 U$2.P$34 U$2.P$33
AUX3_A2
  Top 1.27: CN3.2 22.81,513.79 U$2.P$36 U$2.P$35
AUX3_A3
  Top 1.27: CN3.3 22.43,515.79 U$2.P$38 U$2.P$37
AUX3_A4
  Top 1.27: CN3.4 22.97,517.79 U$2.P$40 U$2.P$39
AUX3_B1
  Top 0.305: U$2.P$1 31.25,508.5 JP2.1
AUX3_B2
  Top 0.305: U$2.P$2 33.25,509.04 JP2.2
AUX3_B3
  Top 0.305: U$2.P$3 33.81,512.79 34.8,511.81 34.8,510.03 JP2.3
AUX3_B4
  Top 0.305: 33.58,513.79 JP2.4
  Top 0.406: U$2.P$4 33.58,513.79
AUX3_B5
  Top 0.305: U$2.P$5 35.12,514.79 JP2.5
AUX3_B6
  Top 0.305: U$2.P$6 36.5,515.79
  Top 0.406: 36.5,515.79 JP2.6
AUX3_B7
  Top 0.305: U$2.P$7 34.96,516.79 JP2.7
AUX3_B8
  Top 0.305: 33.42,517.79 JP2.8
  Top 0.406: U$2.P$8 33.42,517.79
DIR_X
  Top 0.254: U$8.P$57 137.46,536.78 138.43,535.81 139.7,535.81 140.72,534.8 147.7,534.8 148.08,534.42
  Top 0.305: 148.08,534.42 148.09,534.42 M1.D5
DIR_Y  (via drill 0.38)
  Top 0.305: v147.57,531.88 v147.58,531.88 M1.D6
  Bottom 0.254: U$8.P$26 144.71,537.78 145.8,536.7 145.8,532.89 146.81,531.88
  Bottom 0.305: 146.81,531.88 v147.57,531.88
DIR_Z  (via drill 0.38)
  Top 0.254: U$8.P$58 139.76,537.78 140.72,536.83 151.51,536.83 152.65,535.69 158.5,535.69 v159.38,534.8
  Bottom 0.254: v159.38,534.8 159.38,529.36
  Bottom 0.305: 159.38,529.36 159.36,529.34 M1.D7
ENBL
  Top 0.254: U$8.P$50 139.76,529.78 140.72,528.83 142.49,528.83 144.78,526.54 150.37,526.54
  Top 0.305: 150.37,526.54 151.63,525.28 M1.D8
GND  (via drill 0.38, 0.5, 0.6, 1.65)  (35 unrouted)
  Top 0.305: U$8.P$49 137.71,528.78 138.68,527.81 139.7,527.81 140.72,526.8 142.62,526.8 | U$8.P$13 142.6,524.78 142.62,524.76
  Top 0.406: U$14.P$4 371.69,103.97 371.86,104.14 | U$33.P$1@2 436.8,400.23 v436.63,400.05 | U$31.P$1@2 21.59,145.67 v21.34,145.41 | U$30.P$4@2 171.58,20.57 v171.45,20.7 | U$30.P$2@2 167.77,20.57 v167.64,20.7
  Top 0.508: 69.85,430.28 69.85,428.5
  Top 0.61: U$13.P$2@2 292.82,374.18 | U$32.P$4@2 215.65,582.29 v215.52,582.17 | U$32.P$2@2 215.9,578.49 v215.77,578.61 | U$16.P$2@2 69.22,488.57 v69.34,488.44
  Bottom 0.305: U$8.P$25 142.92,536.78 143,536.7 | 34,536.64 30.17,536.64 29.34,535.81 28.32,535.81 27.3,536.83 26.04,536.83 25.15,535.94 25.15,532.89 25.05,532.79 | 29.34,532.79 25.05,532.79 | 25.05,532.79 25.02,532.76 25.02,529.46 25.65,528.83 | 25.65,528.83 28.72,528.83 U$2.P$49 | U$2.P$13 30.58,524.79 29.59,525.78 28.07,525.78 28.07,526.03 27.3,526.8 25.53,526.8 25.4,526.92 25.4,528.57 25.65,528.83
  Bottom 0.406: 25.65,548.13 24.64,547.12 24.64,540.51 25.4,539.75 26.71,539.75 U$2.P$60
  Bottom 0.61: v69.34,488.44 69.34,486.66
  other vias: 370.33,242.57 382.52,242.57 394.46,242.57 394.46,220.98 382.52,220.98 370.33,220.98 369.32,259.59 216.92,430.02 71.12,414.27 157.23,420.12 380.49,82.3 88.65,414.27 240.54,436.37 240.54,428.75 240.54,412.5 303.78,420.12 437.64,420.12 232.92,446.53 243.59,376.17 158.5,298.45 71.12,274.57 86.87,274.57 121.92,261.62 35.22,409.96 37.72,409.96 40.22,409.96 42.72,409.96 45.22,409.96 47.72,409.96 50.22,409.96 52.72,409.96 55.22,409.96 52.72,407.46 50.22,407.46 47.72,407.46 45.22,407.46 42.72,407.46 40.22,407.46 37.72,407.46 30.22,404.96 32.72,402.46 30.22,402.46 32.72,399.96 32.72,397.46 32.72,392.46 32.72,389.96 32.72,387.46 30.22,387.46 30.22,384.96 35.22,379.96 37.72,382.46 37.72,379.96 40.22,379.96 40.22,382.46 42.72,382.46 42.72,379.96 45.22,379.96 45.22,382.46 47.72,382.46 47.72,379.96 50.22,379.96 50.22,382.46 52.72,382.46 52.72,379.96 55.22,379.96 60.22,384.96 57.72,387.46 60.22,387.46 60.22,389.96 57.72,389.96 57.72,392.46 57.72,394.96 57.72,397.46 60.22,399.96 57.72,399.96 57.72,402.46 60.22,402.46 60.22,404.96 37.72,404.96 35.22,404.96 35.22,402.46 52.72,404.96 55.22,404.96 55.22,402.46 55.22,387.46 55.22,384.96 52.72,384.96 37.72,384.96 35.22,384.96 35.22,387.46 127.45,49.11 129.95,49.11 132.45,49.11 134.95,49.11 137.45,49.11 139.95,49.11 142.45,49.11 144.95,49.11 147.45,49.11 144.95,46.61 142.45,46.61 139.95,46.61 137.45,46.61 134.95,46.61 132.45,46.61 129.95,46.61 122.45,44.11 124.95,41.61 122.45,41.61 122.45,39.11 124.95,39.11 124.95,36.61 122.45,36.61 122.45,34.11 124.95,34.11 124.95,31.61 122.45,31.61 122.45,29.11 124.95,29.11 124.95,26.61 122.45,26.61 122.45,24.11 127.45,19.11 129.95,21.61 129.95,19.11 132.45,19.11 132.45,21.61 134.95,21.61 134.95,19.11 137.45,19.11 137.45,21.61 139.95,21.61 139.95,19.11 142.45,19.11 142.45,21.61 144.95,21.61 144.95,19.11 147.45,19.11 152.45,24.11 149.95,26.61 152.45,26.61 152.45,29.11 149.95,29.11 149.95,31.61 152.45,31.61 152.45,34.11 149.95,34.11 149.95,36.61 152.45,36.61 152.45,39.11 149.95,39.11 149.95,41.61 152.45,41.61 152.45,44.11 129.95,44.11 127.45,44.11 127.45,41.61 144.95,44.11 147.45,44.11 147.45,41.61 147.45,26.61 147.45,24.11 144.95,24.11 129.95,24.11 127.45,24.11 127.45,26.61 108.09,456.8 110.59,456.8 113.09,456.8 115.59,456.8 118.09,456.8 120.59,456.8 123.09,456.8 125.59,456.8 128.09,456.8 125.59,454.3 123.09,454.3 120.59,454.3 118.09,454.3 115.59,454.3 113.09,454.3 110.59,454.3 103.09,451.8 105.59,449.3 103.09,449.3 103.09,446.8 105.59,446.8 105.59,444.3 103.09,444.3 103.09,441.8 105.59,441.8 105.59,439.3 103.09,439.3 103.09,436.8 105.59,436.8 105.59,434.3 103.09,434.3 103.09,431.8 133.09,431.8 130.59,434.3 133.09,434.3 133.09,436.8 130.59,436.8 130.59,439.3 133.09,439.3 133.09,441.8 130.59,441.8 130.59,444.3 133.09,444.3 133.09,446.8 130.59,446.8 130.59,449.3 133.09,449.3 133.09,451.8 110.59,451.8 108.09,451.8 108.09,449.3 125.59,451.8 128.09,451.8 128.09,449.3 128.09,434.3 128.09,431.8 125.59,431.8 110.59,431.8 108.09,431.8 108.09,434.3 216.92,596.14 70.61,171.2 140.21,186.94 180.09,248.67 387.1,158.37 381.25,100.84 373.63,103.89 374.01,119.51 292.74,376.3 292.74,374.9 296.04,376.3 296.04,375.03 289.43,376.17 289.43,374.9 98.81,334.52 217.42,418.59 217.42,375.41 394.97,114.43 394.97,116.2 374.01,121.16 387.1,160.15 386.71,169.04 386.71,170.81 179.07,22.73 36.58,159.89 385.32,121.54 386.84,121.54 132.33,334.52 132.33,375.16 98.55,375.16 310.97,50.8 212.09,504.19 186.69,545.59 151.38,497.84 22.2,348.13 66.65,326.54 385.95,300.61 211.33,537.21 210.06,537.21 174.5,306.83 23.23,481.92
  pour Top: 171.45,294.64 370.08,294.64 370.08,258.83 171.45,258.83
  pour Bottom: 376.12,294.64 165.4,294.64 165.4,258.83 376.12,258.83
  pour Top: 395.73,243.33 361.19,243.33 361.19,202.18 395.73,202.18
  pour Bottom: 361.19,243.33 395.73,243.33 395.73,202.18 361.19,202.18
  pour Top: 217.42,596.9 18.8,596.9 18.8,502.67 217.42,502.67
  pour Bottom: 12.75,596.9 223.47,596.9 223.47,423.47 12.75,423.47
  pour Bottom: 18.8,414.78 71.63,414.78 71.63,376.68 18.8,376.68
  pour Top: 77.72,420.88 12.45,420.88 12.45,375.92 77.72,375.92
  pour Bottom: 88.14,414.78 133.35,414.78 133.35,385.83 88.14,385.83
  pour Top: 141.22,420.88 79.76,420.88 80.01,379.73 141.48,379.73
  pour Bottom: 144.37,420.88 204.11,420.88 204.11,379.02 144.37,379.02
  pour Top: 192.02,420.88 156.46,420.88 156.46,385.06 192.02,385.06
  pour Top: 234.7,89.15 387.35,89.15 387.35,12.7 234.7,12.7
  pour Top: 239.78,437.13 438.4,437.13 438.4,429.51 239.78,429.51
  pour Top: 239.78,419.35 438.4,419.35 438.4,411.73 239.78,411.73
  pour Top: 239.78,429.51 289.31,429.51 289.31,419.35 239.78,419.35
  pour Top: 388.87,429.51 438.4,429.51 438.4,419.35 388.87,419.35
  pour Top: 303.02,429.51 375.16,429.51 375.16,419.35 303.02,419.35
  pour Bottom: 289.31,429.51 233.68,429.51 233.68,419.35 289.31,419.35
  pour Bottom: 235.71,411.73 442.47,411.73 442.47,419.35 235.71,419.35
  pour Bottom: 235.71,429.51 442.47,429.51 442.47,437.13 235.71,437.13
  pour Bottom: 303.02,419.35 375.16,419.35 375.16,429.51 303.02,429.51
  pour Bottom: 388.87,419.35 444.5,419.35 444.5,429.51 388.87,429.51
  pour Top: 232.16,590.8 430.78,590.8 430.78,445.77 232.16,445.77
  pour Bottom: 226.11,439.72 436.83,439.72 436.83,596.85 226.11,596.85
  pour Top: 239.78,403.1 438.4,403.1 438.4,383.29 239.78,383.29
  pour Bottom: 233.73,383.29 444.45,383.29 444.45,409.14 233.73,409.14
  pour Top: 242.82,376.94 440.69,376.94 440.69,337.31 438.15,337.31 412.75,362.71 270.76,362.71 245.36,337.31 242.82,337.31
  pour Bottom: 440.69,376.94 242.82,376.94 242.82,337.31 245.36,337.31 270.76,362.71 412.75,362.71 438.15,337.31 440.69,337.31
  pour Top: 18.8,298.96 159,298.96 159,283.72 18.8,283.72
  pour Bottom: 18.8,283.72 159,283.72 159,298.96 18.8,298.96
  pour Top: 363.98,93.73 396.49,93.73 396.49,200.15 363.98,200.15
  pour Bottom: 396.49,99.82 370.08,99.82 370.08,193.8 396.49,193.8
  pour Top: 18.8,275.08 71.63,275.08 71.63,180.85 18.8,180.85
  pour Bottom: 12.75,174.8 77.67,174.8 77.67,281.13 12.75,281.13
  pour Top: 86.36,275.08 112.78,275.08 112.78,180.85 86.36,180.85
  pour Bottom: 112.78,281.13 80.31,281.13 80.31,174.8 112.78,174.8
  pour Top: 121.41,275.08 150.62,275.08 150.62,261.11 121.41,261.11
  pour Bottom: 156.72,275.08 115.32,275.08 115.06,255.02 156.46,255.02
  pour Bottom: 188.09,130.68 203.07,118.24 198.5,113.28 183.51,125.73
  pour Bottom: 100.58,433.07 100.58,425.45 102.62,423.42 133.6,423.42 135.64,425.45 135.64,433.07
  pour Top: 18.8,429.51 217.42,429.51 217.42,492.51 18.8,492.51
  pour Bottom: 91.49,377.19 139.4,377.19 139.4,333.25 91.49,333.25
  pour Top: 133.35,377.19 97.54,377.19 97.54,333.25 133.35,333.25
  pour Bottom: 216.66,419.61 231.14,419.61 231.14,374.65 216.66,374.65
  pour Top: 231.14,425.45 210.57,425.45 210.31,368.55 230.89,368.55
  pour Top: 119.94,19.53 119.94,18.62 121.95,16.61 152.96,16.61 154.94,18.59 154.94,20.57 119.94,20.57 119.94,19.56
  pour Top: 11.68,351.79 76.71,351.79 76.71,314.2 11.68,314.2
  pour Bottom: 76.71,351.79 11.68,351.79 11.68,314.2 76.71,314.2
  pour Top: 379.48,304.55 444.25,304.55 443.99,268.73 379.22,268.73
  pour Top: 12.45,28.96 12.45,12.45 196.6,12.45 196.6,13.97 196.34,13.97 196.34,22.61 232.92,22.61 232.92,97.03 332.74,97.03 332.74,105.16 352.81,105.16 352.81,250.44 283.97,250.44 283.97,210.06 279.65,210.06 279.65,250.44 180.59,250.44 180.59,255.78 176.53,255.78 176.53,252.98 138.18,252.98 138.18,172.97 69.34,172.97 69.34,166.12 42.16,166.12 42.16,170.43 12.19,170.43 12.19,28.96
  pour Bottom: 18.8,18.8 87.63,18.8 87.63,58.93 91.95,58.93 91.95,18.8 191.01,18.8 191.01,14.73 232.92,14.73 232.92,96.27 302.77,96.27 302.77,102.87 330.96,102.87 330.96,97.03 359.66,97.03 359.66,257.05 176.53,257.05 176.53,246.38 138.68,246.38 138.68,172.97 38.86,172.97 38.86,163.83 18.8,163.83
  pour Top: 173.23,313.94 377.95,313.94 377.95,295.66 173.23,295.66
LIM_X  (via drill 0.38)
  Top 0.406: v180.47,458.98 180.47,472.82 v174.5,478.79 | v171.7,521.59 v165.23,521.59
  Bottom 0.305: U$8.P$29 166.1,540.78 167,539.88 167,521.59 165.61,520.19 164.47,520.19 | v165.23,521.59 165.23,520.95 164.47,520.19 | 164.47,520.19 163.07,520.19 161.8,518.92 152.15,518.92 151.64,519.43 151.64,522.48 151.9,522.74 M1.D9
  Bottom 0.406: 180.47,446.55 v180.47,458.98 | v174.5,478.79 174.5,500.76 175.51,501.78 175.51,517.78 v171.7,521.59
  Bottom 0.61: 185.93,445.19 R3.2 182.57,445.57 U$18.P$3 181.83,445.19 180.47,446.55
LIM_Y  (via drill 0.38)  (1 unrouted)
  Top 0.254: U$8.P$61 137.4,540.78 138.43,539.75 139.7,539.75 140.72,538.73 146.81,538.73 147.32,538.23 159.77,538.23 v161.67,536.32
  Top 0.305: U$16.P$3@2 71.12,479.55 76.71,473.96 102.62,473.96 110.74,465.84 122.17,465.84 129.54,473.2 152.65,473.2 v162.31,482.85 | v161.29,510.54 161.29,521.46 v161.54,521.59
  Top 0.61: U$13.P$3@2 294.73,371.44 293.11,369.82 292.61,369.82 291.82,369.04 R2.2 291.69,367.64 U$19.P$3
  Bottom 0.254: v161.67,536.32 161.67,522.61
  Bottom 0.305: v162.31,482.85 162.31,509.52 v161.29,510.54 | v161.54,521.59 161.67,522.61 | 160.15,520.19 160.14,520.2 M1.D10
  Bottom 0.406: 160.15,520.19 v161.54,521.59
LIM_Z  (via drill 0.38)  (1 unrouted)
  Top 0.406: U$14.P$1 374.23,100.16 383.79,109.73 383.79,153.16 389.64,157.73 393.95,157.73 394.97,158.75 394.97,164.08 393.19,165.86 392.68,165.86 | 392.94,169.09 U$20.P$3 392.79,165.96 392.68,165.86 | U$10.P$1 94.05,509.08 93.47,508.51 93.47,506.98 89.92,503.43 73.91,503.43 72.64,502.16 72.64,479.81 77.22,475.23 102.62,475.23 111,466.85 121.92,466.85 129.29,474.22 151.89,474.22 v160.78,483.11 | 392.68,165.86 392.94,165.6 R1.2
  Bottom 0.254: U$8.P$30 150.62,541.78 152.15,543.31 166.62,543.31 169.16,540.77 169.16,517.65 166.62,515.11 160.02,515.11
  Bottom 0.305: 157.99,514.6 157.48,515.12 156.33,515.12 M1.D11
  Bottom 0.406: v160.78,483.11 160.78,508 157.99,510.79 157.99,514.6 158.5,515.11 160.02,515.11
M8  (via drill 0.38)
  Top 0.305: U$8.P$32 150.42,552.96 186.69,552.96 192.28,547.37 192.28,543.81 v194.06,542.04
  Bottom 0.305: v194.06,542.04 R14.1
N$1
  pour Top: 188.21,130.81 203.2,118.49 198.5,113.41 183.51,125.73
N$2  (via drill 4.2 pad 8.89)  (11 unrouted)
  other vias: 244.98,62.92 256.97,62.89 268.99,62.89 280.97,62.92 292.96,62.92 304.95,62.89 316.97,62.89 328.98,62.89 340.97,62.89 352.96,62.89 364.97,62.89 376.99,62.89
N$3  (via drill 6.1 pad 9.14)  (11 unrouted)
  other vias: 431.03,294.69 392.93,294.7 156.22,441.77 80.01,441.77 162.85,34.12 112.06,34.1 208.77,234.98 259.57,234.98 300.99,390.77 377.19,390.76 64.26,395.01 26.16,395.01
N$4  (via drill 3.3 pad 6.86, 3.3 pad 8.13)  (11 unrouted)
  other vias: 19.05,322.07 25.15,328.12 64.16,344.25 69.44,337.46 365.4,233.58 377.47,233.6 389.53,233.58 389.53,212.06 377.47,212.06 365.4,212.04 83.26,401.42 138.23,401.42
N$5
  Top 0.406: 236.22,519.18 283.21,566.93 283.21,591.82
  Top 2.184: 236.22,515.87 236.22,519.18
N$6
  Top 1.422: 283.21,594.11 283.21,591.82
N$7
  Top 1.778: 69.85,427.99 69.85,425.45
N$8
  Top 0.406: L1.C R6.2
  Top 0.61: 131.41,356.65 R6.2
N$10
  Top 0.406: 99.73,356.9 99.82,356.81 L2.C
  Top 0.61: 99.73,356.9 R7.2
N$11
  Top 0.61: R8.2 113.92,371.44 L3.C
N$12
  Bottom 0.254: M1.A0 R11.2
N$13
  Bottom 0.254: M1.A1 R12.2
N$14
  Top 1.016: 72.16,510.35 72.13,510.38
N$15
  Top 1.016: 72.16,512.89 72.13,512.92
N$16
  Top 1.016: 72.16,515.43 72.13,515.46
N$17
  Bottom 0.254: M1.A2 R13.2
N$18
  Bottom 0.254: M1.A3 R14.2
N$19
  Bottom 0.254: M1.A4 R15.2
N$20
  Bottom 0.254: M1.A5 R16.2
N$21
  Bottom 0.305: 198.88,539.5 196.85,539.5
N$22
  Bottom 0.305: 199.14,542.04 196.6,542.04
N$23
  Bottom 0.305: 199.14,544.58 196.6,544.58
PAUSE  (via drill 0.38)  (2 unrouted)
  Top 0.305: v196.6,537.21 196.6,571.25 211.33,585.98 220.34,585.98
  Top 0.406: U$33.P$3@2 414.45,396.42 410.72,392.68 403.18,392.68 U$36.P$2 | 220.34,585.98 U$32.P$6@2
  Bottom 0.254: 193.55,536.96 R12.1
  Bottom 0.305: U$8.P$31 143.5,542.78 152.15,551.43 185.67,551.43 190.25,546.86 190.25,540.26 193.55,536.96 | R12.1 196.6,536.96 198.88,536.96 | Q1.3 197.61,538.23 v196.6,537.21
  Bottom 0.406: U$30.P$6@2 175.39,57.53 166.62,66.29 38.86,66.29 25.4,79.76 U$31.P$3@2 | 196.6,536.96 v196.6,537.21
PAUSE_INVERT  (via drill 0.38)  (1 unrouted)
  Top 0.406: U$21.P$3 168.3,55.5 R4.2 168.71,51.05 169.93,51.05 171.2,49.78 171.2,30.48 169.67,28.96 U$30.P$3@2 | v213.11,576.58 213.11,579.12 214.38,580.39 U$32.P$3@2
  Bottom 0.406: Q1.1 211.84,539.18 213.11,540.45 v213.11,576.58
POWER
  Bottom 2.54: 199.64,442.47 CN1.PWR1 207.09,457.37 U$41.P$3
PROBE  (via drill 0.38, 0.6)  (1 unrouted)
  Top 0.305: U$8.P$64 135.64,544.67 135.64,546.86 142.49,553.72 187.2,553.72 v193.8,547.12 195.33,545.59 v195.33,530.61
  Top 0.61: U$40.P$1@2 285.75,564.39 240.28,518.92 | v130.3,470.92 154.18,470.92 164.59,481.33 171.2,481.33 171.96,480.57 176.02,480.57 v177.8,482.35
  Top 0.813: 239.78,519.68 240.28,519.18
  Top 2.184: 240.28,519.18 240.28,518.92 240.28,515.87
  Bottom 0.305: v193.8,547.12 196.34,547.12 R16.1 199.14,547.12 | v177.8,482.35 177.8,513.08 v195.33,530.61
  Bottom 0.406: 196.34,547.22 R16.1
  Bottom 0.61: R5.2 67.43,467.48 71.37,471.42 102.11,471.42 109.73,463.8 123.19,463.8 v130.3,470.92
PROBE_OUT  (1 unrouted)
  Bottom 0.61: R5.1 70.23,432.43 72.39,430.28 U$39.P$1@2
SP_A1  (via drill 0.6)  (2 unrouted)
  Top 0.61: U$11.P$1 76.09,510.38 U$11.P$2 | U$5.P$34 78.13,509.17
  Top 1.016: 78.13,509.17 U$11.P$1 | U$15.P$1 394.44,101.09 389.89,101.09 389.55,101.43 U$15.P$2
  Top 1.27: U$5.P$33 U$5.P$34 | 389.28,101.35 v387.1,101.35 v385.57,102.87
  Bottom 1.016: 378.46,109.98 378.46,172.72 374.9,176.28 374.9,186.44 379.73,191.26 | 383.76,191.26 U$12.P$2
  Bottom 1.27: v387.1,101.35 v385.57,102.87 378.46,109.98 | 379.73,191.26 383.76,191.26
SP_A2  (via drill 0.6)  (1 unrouted)
  Top 0.61: U$11.P$3 76.09,512.92 U$11.P$4 | U$5.P$36 78.61,511.65
  Top 1.016: 78.61,511.65 U$11.P$3 | U$15.P$3 394.69,103.38 389.64,103.38 389.36,103.65 U$15.P$4 389.28,103.89
  Top 1.27: U$5.P$35 U$5.P$36 | 389.28,103.89 v387.35,103.89 v385.83,105.41 385.76,105.47
  Bottom 1.016: 380.24,111 380.24,173.74 376.94,177.04 376.94,184.4 379.73,187.2 | 383.76,187.2 U$12.P$11
  Bottom 1.27: v387.35,103.89 v385.83,105.41 380.24,111 | 379.73,187.2 383.76,187.2
SP_A3  (via drill 0.6)  (1 unrouted)
  Top 0.61: U$11.P$6 76.09,515.46 U$11.P$5 79.15,514.19 U$5.P$38
  Top 1.016: U$15.P$5 394.69,105.92 389.64,105.92 389.36,106.19 U$15.P$6 389.28,106.43
  Top 1.27: U$5.P$37 U$5.P$38 | 389.28,106.43 v387.35,106.43 386.4,107.38 v386.08,107.7
  Bottom 1.016: 382.02,111.76 382.02,175.01 378.97,178.05 378.97,181.61 380.24,182.88 | 383.7,182.88 U$17.P$2
  Bottom 1.27: v387.35,106.43 v386.08,107.7 382.02,111.76 | 380.24,182.88 383.7,182.88
SP_A4  (via drill 0.6)  (1 unrouted)
  Top 0.61: U$11.P$8 76.09,518 U$11.P$7 79.69,516.73 U$5.P$40
  Top 1.016: 72.16,517.97 U$11.P$8 | U$15.P$7 394.44,108.71 389.64,108.71 389.36,108.98 U$15.P$8
  Top 1.27: U$5.P$39 U$5.P$40 | U$15.P$8 387.52,109.05 v387.35,109.22 386.65,109.92 v386.46,110.11
  Bottom 1.27: v387.35,109.22 v386.46,110.11 383.54,113.03 U$17.P$11
SP_DIR  (via drill 0.38)
  Top 0.254: v163.07,521.59 163.07,513.08 v162.56,512.57
  Top 0.305: v159.77,512.57 v159.76,512.58 M1.D13
  Bottom 0.254: U$8.P$27 146,538.78 146.56,538.23 162.56,538.23 163.07,537.72 v163.07,521.59
  Bottom 0.305: v162.56,512.57 v159.77,512.57
SP_PWM  (via drill 0.38)
  Top 0.254: U$8.P$55 137.68,534.78 138.68,533.78 139.7,533.78 140.72,532.76 142.37,532.76 142.75,532.38 144.02,532.38 147.83,528.57 v148.84,528.57
  Bottom 0.254: v148.84,528.57 148.84,518.16
  Bottom 0.305: 148.84,518.16 151.89,515.12 M1.D12
START  (via drill 0.38)  (2 unrouted)
  Top 0.305: U$8.P$63 137.65,542.78 138.68,543.81 139.7,543.81 140.72,542.8 141.99,542.8 151.38,552.2 186.18,552.2 191.26,547.12 191.26,542.29 v194.06,539.5
  Top 0.406: U$33.P$4@2 431.34,394.51 429.77,392.94 420.89,392.94 U$35.P$2
  Bottom 0.305: v194.06,539.5 R13.1 196.6,539.5 197.87,540.77 208.53,540.77
  Bottom 0.406: U$30.P$7@2 177.29,57.15 167.13,67.31 39.37,67.31 27.43,79.25 27.43,166.88 U$31.P$4@2 | 208.53,540.77 210.82,540.77 212.09,542.04 212.09,586.74 213.36,588.01 U$32.P$7@2
STEP_X  (via drill 0.38)
  Top 0.254: v167.89,535.43 167.89,534.42 166.62,533.15 144.02,533.15 143.51,533.65 141.38,533.65 U$8.P$22
  Bottom 0.254: 166.37,542.04 167.89,540.51 v167.89,535.43
  Bottom 0.305: 166.37,542.04 M1.D2
STEP_Y  (via drill 0.38)
  Top 0.254: U$8.P$54 137.54,533.78 138.05,533.27 138.05,532.26 138.56,531.75 139.7,531.75 140.72,530.73 143,530.73 146.43,527.3 v164.59,527.3
  Top 0.305: v164.85,535.18 164.85,537.72 163.07,539.5 M1.D3
  Bottom 0.254: v164.85,535.18 164.85,527.56 v164.59,527.3
STEP_Z
  Bottom 0.254: U$8.P$23 144.16,534.78 144.78,534.16 144.78,531.62 146.81,529.59 148.84,529.59 149.35,530.1 149.35,536.45
  Bottom 0.305: 149.35,536.45 149.86,536.96 M1.D4
STOP  (via drill 0.38)  (2 unrouted)
  Top 0.305: U$8.P$62 139.7,541.78 140.72,540.77 141.99,540.77 142.49,541.27 142.49,541.78 152.15,551.43 185.67,551.43 190.25,546.86 190.25,540.26 192.02,538.48 192.02,535.94 v193.55,534.42
  Top 0.406: U$33.P$2@2 399.08,398.32 393.45,392.68 U$37.P$2
  Bottom 0.305: v193.55,534.42 R11.1 196.6,534.42 | 196.6,534.42 197.87,535.69 212.09,535.69 | 199.14,534.42 196.6,534.42
  Bottom 0.406: 212.09,535.69 212.85,535.69 214.12,536.96 214.12,582.93 215.39,584.2 U$32.P$5@2 | U$30.P$5@2 173.48,57.91 166.12,65.28 38.35,65.28 23.62,80.01 23.62,166.88 U$31.P$2@2
VCC
  Bottom 0.61: 133.35,496.06 133.6,496.32
  Bottom 1.016: U$5.P$41 U$5.P$42 U$5.P$43
  Bottom 1.422: 100.33,496.82 101.6,495.55 101.6,495.81 101.09,496.32 | 115.09,496.32 114.08,496.82 114.08,518.41 115.71,519.79 U$7.P$42 | 133.6,496.32 132.33,497.59 132.33,518.41 133.7,519.78 U$8.P$42 | U$8.P$43 U$8.P$42 | U$8.P$41 U$8.P$42 | U$7.P$43 U$7.P$42 | U$7.P$41 U$7.P$42 | U$6.P$41 U$6.P$42 | U$6.P$43 U$6.P$42 | U$5.P$42 79.61,519.79 78.74,518.92 78.74,496.57 78.99,496.32 | U$6.P$42 97.9,519.79 96.77,518.67 96.77,497.08 96.01,496.32 | U$2.P$43 U$2.P$42 U$2.P$41 | U$3.P$43 44.2,519.79 | U$3.P$41 U$3.P$42 | U$4.P$43 U$4.P$42 U$4.P$41
  Bottom 1.676: U$2.P$42 25.76,519.79 24.64,518.67 24.64,496.82 23.62,496.32 | U$3.P$42 44.2,519.79 43.29,519.29 42.67,518.41 42.67,496.57 42.42,496.32 | U$4.P$42 61.58,519.79 60.71,518.92 60.71,496.57 59.94,496.32
  Bottom 2.54: 133.8,496.32 133.6,496.32 123.7,496.32 | 123.7,496.32 115.09,496.32 101.09,496.32 96.01,496.32 78.99,496.32 59.94,496.32 42.42,496.32 23.62,496.32 21.08,496.32 | 123.7,496.32 123.44,496.06 123.44,487.43 147.57,463.3 189.61,463.3 189.61,456.06 192.79,452.88 199.77,452.88 U$41.P$4
WELD  (via drill 0.38)  (486 unrouted)
  Top 0.406: v17.78,503.17 16,503.56
  other vias: 17.78,584.71 17.78,583.18 17.78,558.29 17.78,556.77 17.78,531.88 17.78,530.35 17.78,492.25 17.78,465.84 17.78,464.31 17.78,439.42 17.78,437.9 30.99,428.5 32.51,428.5 57.4,428.5 58.93,428.5 83.82,428.5 85.34,428.5 138.18,428.5 163.07,428.5 164.59,428.5 189.48,428.5 191.01,428.5 216.92,428.5 218.44,437.9 218.44,451.1 218.44,452.63 218.44,465.84 218.44,479.04 218.44,503.17 218.44,530.35 218.44,531.88 218.44,556.77 218.44,558.29 218.44,571.5 218.44,591.06 231.14,583.18 231.14,571.5 231.14,569.98 231.14,545.08 231.14,543.56 231.14,518.67 231.14,517.14 231.14,492.25 231.14,490.73 231.14,465.84 231.14,452.63 231.14,451.1 244.35,444.75 245.87,444.75 270.76,444.75 272.29,444.75 297.18,444.75 298.7,444.75 323.6,444.75 325.12,444.75 350.01,444.75 351.54,444.75 376.43,444.75 377.95,444.75 402.84,444.75 404.37,444.75 430.28,444.75 431.8,451.1 431.8,464.31 431.8,465.84 431.8,490.73 431.8,492.25 431.8,517.14 431.8,518.67 431.8,543.56 431.8,545.08 431.8,569.98 431.8,571.5 431.8,584.71 430.28,591.82 404.37,591.82 402.84,591.82 377.95,591.82 376.43,591.82 351.54,591.82 298.7,591.82 297.18,591.82 272.29,591.82 270.76,591.82 232.66,591.82 231.14,584.71 17.78,401.07 17.78,394.97 17.78,402.59 24.89,415.8 38.1,415.8 51.31,415.8 64.52,415.8 66.04,415.8 72.64,414.27 72.64,401.07 72.64,394.97 248.41,83.82 237.49,83.82 261.62,83.82 286.51,83.82 288.04,83.82 338.58,83.82 343.41,83.82 362.58,83.82 374.27,83.82 380.49,83.82 382.02,69.09 382.02,44.2 382.02,42.67 382.02,19.3 380.49,17.78 367.28,17.78 365.76,17.78 340.87,17.78 339.34,17.78 314.45,17.78 312.93,17.78 288.04,17.78 286.51,17.78 261.62,17.78 260.1,17.78 246.89,17.78 239.78,19.3 239.78,30.99 239.78,55.88 239.78,57.4 239.78,82.3 382.02,82.3 87.12,408.69 88.65,415.8 87.12,407.16 87.12,391.92 88.65,384.81 119.63,384.81 132.84,384.81 134.37,391.92 134.37,407.16 134.37,408.69 121.16,415.8 119.63,415.8 164.85,384.05 182.12,384.05 183.64,384.05 155.45,385.57 155.45,407.16 155.45,408.69 193.17,385.7 193.04,398.78 193.04,408.69 251.97,404.11 253.49,404.11 278.38,404.11 279.91,404.11 304.8,404.11 306.32,404.11 331.22,404.11 332.74,404.11 357.63,404.11 359.16,404.11 384.05,404.11 385.57,404.11 410.46,404.11 411.99,404.11 437.9,404.11 439.42,402.34 439.42,391.92 238.76,397 238.76,395.48 241.68,368.55 241.81,355.35 241.81,353.82 243.33,378.08 268.48,378.08 270,378.08 281.69,378.08 283.21,378.08 297.69,378.08 309.63,378.08 322.83,378.08 342.01,378.08 375.67,378.08 388.87,378.08 402.08,378.08 415.29,378.08 428.5,378.08 441.83,368.55 441.83,367.03 441.83,353.82 238.76,424.94 238.76,423.42 439.42,424.94 439.42,423.42 290.7,420.62 291.97,421.89 293.24,420.62 294.51,421.89 295.78,420.62 297.05,421.89 298.32,420.62 299.59,421.89 300.86,420.62 290.7,428.24 291.97,426.97 293.24,428.24 294.51,426.97 295.78,428.24 297.05,426.97 298.32,428.24 299.59,426.97 300.86,428.24 387.22,428.24 385.95,426.97 384.68,428.24 383.41,426.97 382.14,428.24 380.87,426.97 379.6,428.24 378.33,426.97 377.06,428.24 387.22,420.62 385.95,421.89 384.68,420.62 383.41,421.89 382.14,420.62 380.87,421.89 379.6,420.62 378.33,421.89 377.06,420.62 17.78,292.61 17.78,294.13 19.68,300.48 160.02,294.13 160.02,292.61 428.24,232.41 413.77,238.76 415.29,231.65 415.29,230.12 428.24,230.89 426.08,217.68 417.45,216.92 415.29,203.71 428.24,204.47 426.21,191.26 417.45,190.5 428.24,178.05 428.24,164.85 415.29,150.88 428.24,151.64 415.29,137.67 415.29,124.46 428.24,138.43 428.24,125.22 428.24,112.01 415.29,111.25 412.75,96.52 411.23,96.52 430.78,96.52 432.31,96.52 429.77,238.76 384.3,194.82 382.78,195.33 378.71,193.29 370.84,170.94 369.06,172.97 369.06,120.14 383.03,98.81 384.56,98.81 339.09,104.14 340.61,104.14 353.82,104.65 353.82,117.86 353.82,131.06 353.82,144.27 353.82,157.48 353.82,170.69 353.82,183.9 353.82,197.1 353.82,210.31 353.82,211.84 353.82,236.73 353.82,238.25 353.31,251.46 340.11,251.46 338.58,251.46 325.37,251.46 300.48,251.46 298.96,251.46 274.07,251.46 272.54,251.46 247.65,251.46 246.13,251.46 221.23,251.46 219.71,251.46 194.82,251.46 193.29,251.46 24.89,276.1 26.42,276.1 51.31,276.1 52.83,276.1 66.04,276.1 72.64,274.57 72.64,249.68 72.64,248.16 72.64,196.85 72.64,195.33 66.04,179.83 64.39,179.83 39.62,179.83 38.1,179.83 24.89,179.83 17.78,181.36 17.78,196.85 17.78,248.16 17.78,249.68 17.78,274.57 83.06,276.1 85.34,274.57 85.34,249.68 85.34,248.16 85.34,196.85 85.34,195.33 92.46,179.83 93.98,179.83 100.84,179.83 99.06,276.1 100.58,276.1 118.24,260.1 120.4,261.62 143,260.1 144.53,260.1 151.64,261.62 170.43,289.31 170.43,279.4 170.43,277.88 170.43,267.97 371.09,289.05 371.09,287.53 371.09,277.62 371.09,267.72 125.48,245.87 123.95,245.87 131.83,232.66 131.83,231.14 131.83,206.25 131.83,204.72 131.83,181.36 125.48,179.83 123.95,179.83 121.79,216.92 121.67,208.91 17.78,151.38 17.78,149.86 17.78,124.97 17.78,123.44 17.78,98.55 17.78,97.03 17.78,72.14 17.78,70.61 17.78,45.72 17.78,44.2 17.78,19.3 18.29,17.78 19.81,17.78 42.16,17.78 53.85,17.78 71.12,17.78 99.06,17.78 112.27,17.78 162.81,17.78 180.34,17.78 384.56,292.61 384.56,291.08 384.56,281.18 388.37,273.81 389.89,273.81 399.8,273.81 418.08,273.81 419.61,273.81 437.9,273.81 439.42,273.81 439.42,275.34 439.42,291.08 439.42,292.61 392.18,252.73 399.29,251.21 400.81,251.21 416.56,251.21 432.31,251.21 439.42,252.73 401.83,86.11 394.72,84.58 403.35,86.11 417.19,86.23 418.85,86.11 425.96,84.58 401.83,66.17 403.86,66.17 425.83,65.91 427.74,65.91 434.59,61.98 434.59,48.77 434.59,35.56 392.56,45.72 392.56,44.2 392.81,30.99 392.56,15.37 403.61,15.24 425.83,15.24 427.61,15.11 219.96,20.07 207.26,20.07 204.72,21.34 55.12,167.13 56.64,167.13 17.78,366.52 17.78,365 19.3,369.06 44.2,369.06 45.72,369.06 70.61,369.06 72.14,369.06 83.82,366.52 83.82,365 46.86,358.9 54.74,358.9 96.52,365 96.52,363.47 96.52,338.58 96.52,333.76 108.2,332.23 121.16,332.23 122.68,332.23 134.37,337.06 134.37,338.58 134.37,363.47 134.37,365 328.17,101.85 303.78,101.85 151.64,247.4 153.16,247.4 166.37,247.4 80.14,341.12 81.41,342.39 82.68,341.12 83.95,342.39 85.22,341.12 86.49,342.39 87.76,341.12 165.74,341.12 167,342.39 168.28,341.12 169.54,342.39 170.81,341.12 172.09,342.39 173.35,341.12 215.65,410.97 217.17,420.62 215.65,409.45 215.65,384.56 215.65,383.03 217.17,373.63 92.33,17.78 89.28,46.23 90.55,43.69 90.93,31.5 360.05,378.08 280.67,237.62 280.8,224.28 280.67,211.07 29.46,164.85 19.3,164.85 46.86,357.38 54.86,357.38 120.14,216.92 120.14,208.91 74.04,501.14 118.75,500.89 136.78,499.62 157.35,501.14 220.6,499.62 63.88,501.01 45.85,501.01 32.64,501.01 85.47,501.01 98.68,501.27 170.56,501.27 183.77,501.27 196.98,501.27 205.36,501.27 137.16,15.75 150.37,15.62 213.87,346.46 213.87,344.93 231.14,340.11 232.66,340.11 347.65,347.98 348.92,345.44 350.95,339.6 364.92,339.6 386.51,339.6 395.4,339.6 395.15,352.04 396.42,354.58 246,591.95 245.75,54.64 258.95,54.64 272.16,54.64 338.2,54.64 351.41,54.64 364.62,54.64 376.05,46.91 362.84,46.91 349.63,46.91 283.59,46.91 270.38,46.91 257.18,46.91 369.06,96.77 324.99,54.64 311.79,54.64 298.58,54.64 285.37,54.64 23.62,300.23 36.83,300.23 50.04,300.23 63.25,300.23 76.45,300.23 89.66,300.23 102.87,300.23 116.08,300.23 129.29,300.23 142.49,300.23 30.86,501.01 369.06,174.5 368.55,187.71
  pour Top: 15.06,596.9 18.29,596.9 18.29,584.2 15.06,584.2
  pour Top: 15.06,583.69 18.29,583.69 18.29,570.99 15.06,570.99
  pour Top: 15.06,570.48 18.29,570.48 18.29,557.78 15.06,557.78
  pour Top: 15.06,557.28 18.29,557.28 18.29,544.58 15.06,544.58
  pour Top: 15.06,544.07 18.29,544.07 18.29,531.37 15.06,531.37
  pour Top: 15.06,530.86 18.29,530.86 18.29,518.16 15.06,518.16
  pour Top: 15.06,517.65 18.29,517.65 18.29,502.67 15.06,502.67
  pour Top: 15.06,492.76 18.29,492.76 18.29,478.54 15.06,478.54
  pour Top: 15.06,478.03 18.29,478.03 18.29,465.33 15.06,465.33
  pour Top: 15.06,464.82 18.29,464.82 18.29,452.12 15.06,452.12
  pour Top: 15.06,451.61 18.29,451.61 18.29,438.91 15.06,438.91
  pour Top: 15.06,438.4 18.29,438.4 18.29,425.7 15.06,425.7
  pour Top: 18.8,425.78 18.8,429.01 31.5,429.01 31.5,425.78
  pour Top: 32,425.78 32,429.01 44.7,429.01 44.7,425.78
  pour Top: 45.21,425.78 45.21,429.01 57.91,429.01 57.91,425.78
  pour Top: 58.42,425.78 58.42,429.01 67.82,429.01 67.82,425.78
  pour Top: 74.42,425.78 74.42,429.01 84.33,429.01 84.33,425.78
  pour Top: 84.84,425.78 84.84,429.01 97.54,429.01 97.54,425.78
  pour Top: 137.67,425.78 137.67,429.01 150.37,429.01 150.37,425.78
  pour Top: 150.88,425.78 150.88,429.01 163.58,429.01 163.58,425.78
  pour Top: 164.08,425.78 164.08,429.01 176.78,429.01 176.78,425.78
  pour Top: 177.29,425.78 177.29,429.01 189.99,429.01 189.99,425.78
  pour Top: 190.5,425.78 190.5,429.01 203.2,429.01 203.2,425.78
  pour Top: 203.71,425.78 203.71,429.01 217.42,429.01 217.42,425.78
  pour Top: 221.16,590.55 217.93,590.55 217.93,596.9 221.16,596.9
  pour Top: 221.16,570.99 217.93,570.99 217.93,574.04 221.16,574.04
  pour Top: 221.16,557.78 217.93,557.78 217.93,570.48 221.16,570.48
  pour Top: 221.16,544.58 217.93,544.58 217.93,557.28 221.16,557.28
  pour Top: 221.16,531.37 217.93,531.37 217.93,544.07 221.16,544.07
  pour Top: 221.16,518.16 217.93,518.16 217.93,530.86 221.16,530.86
  pour Top: 221.16,502.67 217.93,502.67 217.93,517.65 221.16,517.65
  pour Top: 221.16,478.54 217.93,478.54 217.93,492.76 221.16,492.76